# EAGLE board Messchieber_Bluetooth_biley (EAGLE 6.4)
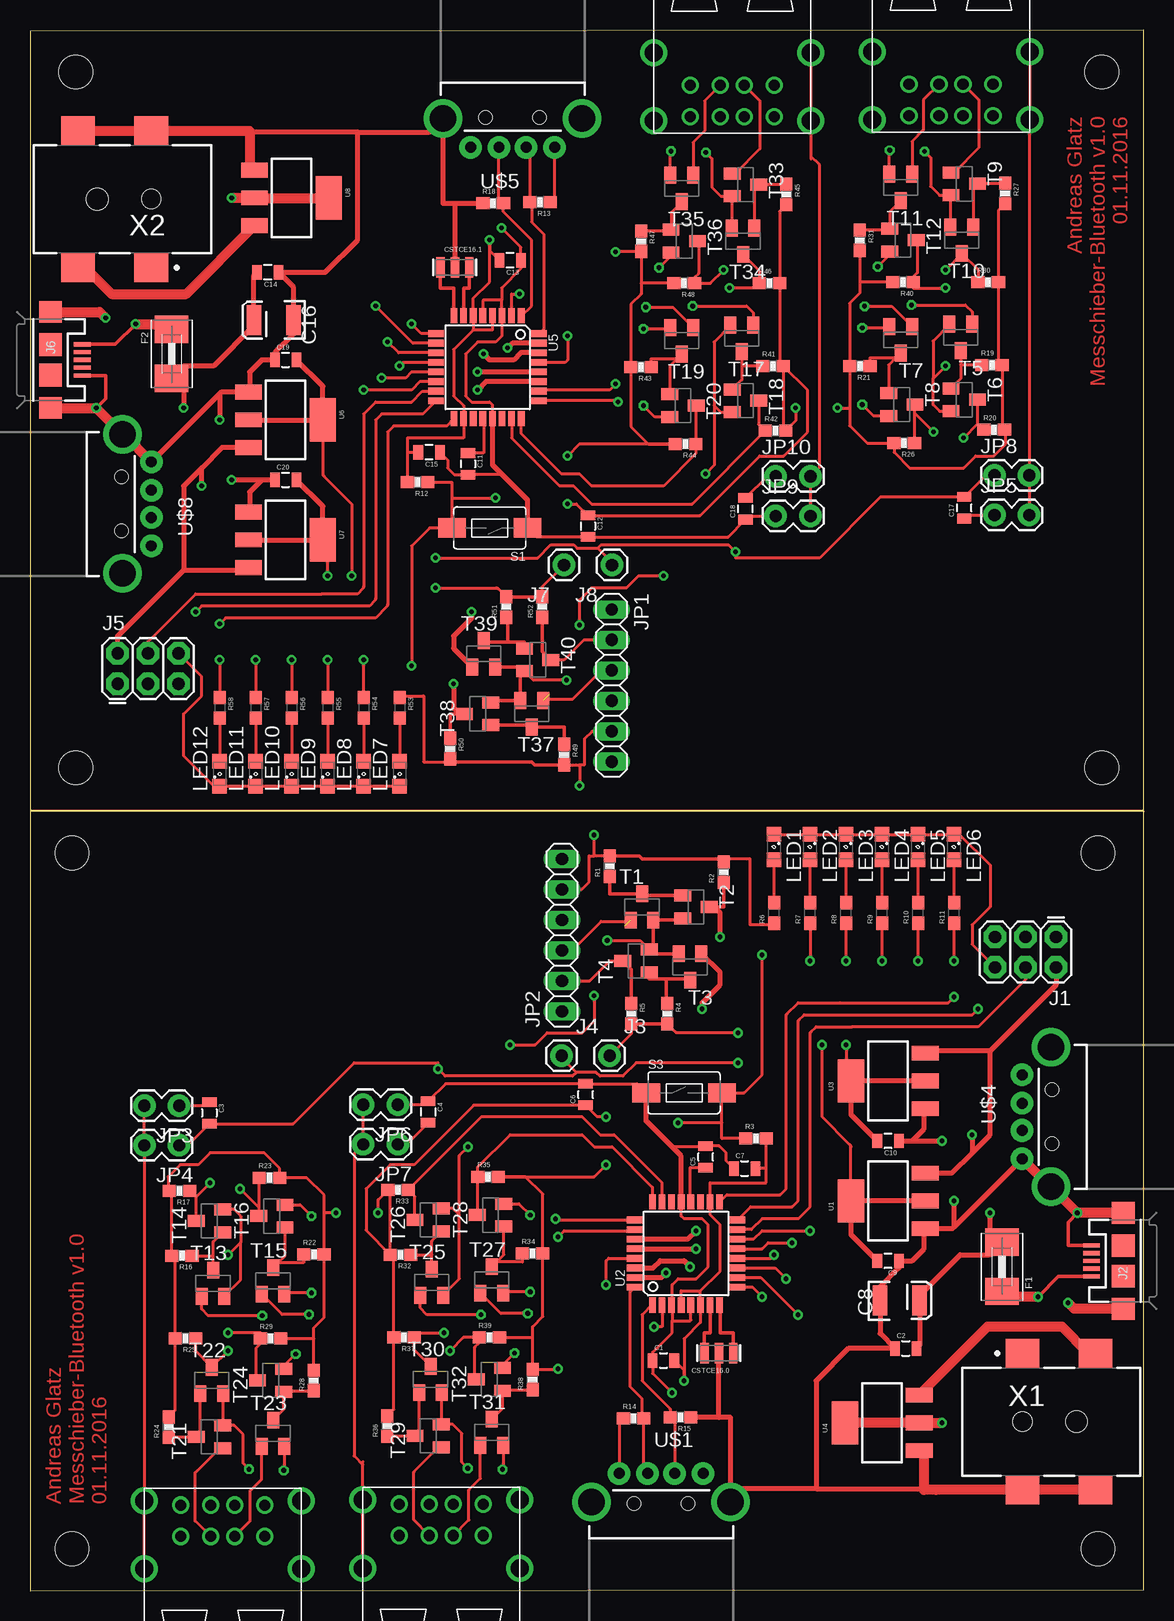
[diagram p0: board, top side]
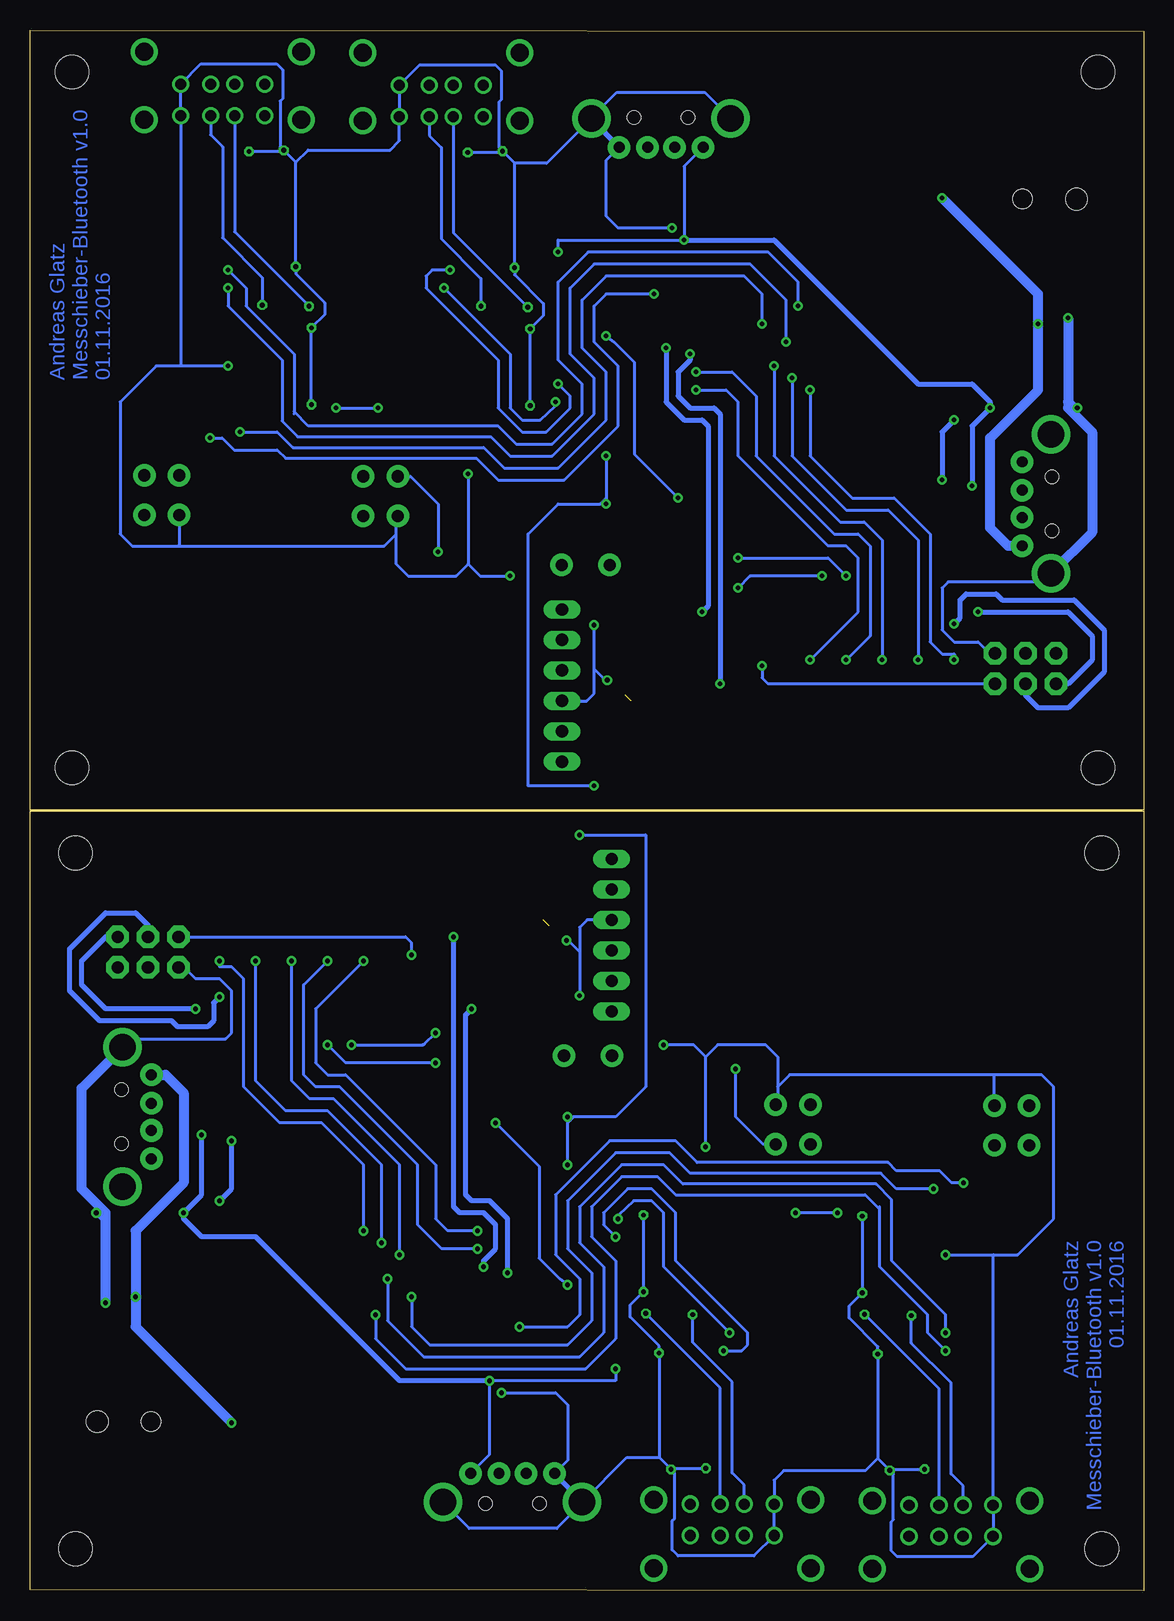
[diagram p1: board, bottom side, seen from below]

Size 92.8 x 130.1 mm. Coordinates in mm from the lower left corner, seen from the top.
Outline: 0,0 92.8,0.1 92.8,65 0,65 0,0
Outline: 92.8,130.1 0,130 0,65.1 92.8,65.1 92.8,130.1
Copper layers (1*16): Top 0.035mm / dielectric 1.5mm / Bottom 0.035mm
Design rules "bilex-lp-eagle-rules": minimum track width 10mil, minimum drill 0.4mm, track to track 10mil, track to pad 10mil, pad to pad 10mil, via to via 10mil, smd to smd 10mil, copper to edge 0.5mm, drill to drill 10mil, minimum pad ring 10mil, minimum via ring 8mil, stop-mask expansion 0.075mm, vias tented up to drill 0mil, thermal gap 10mil
Net classes: 0 default: width 0.203 mm, clearance 0.205 mm
Holes 2.8 mm at 3.5,3.5 89,61.5 3.5,61.5 89,3.5 89.3,126.6 3.8,68.6 89.3,68.6 3.8,126.6
Milling: 2 lines

## Footprints (pad centres in the part's own frame; a part is rotated, then mirrored left to right if it is on the bottom)
0805 = smd 0.8 x 1.2: 1 -0.9,0; 2 0.9,0
EIA3528 = smd 1.2 x 2.5: A 1.65,0; C -1.65,0
RESONATOR-SMD = smd 0.7 x 1.7: 1 -1.2,0; 2 0,0; 3 1.2,0
1812 = smd 2.286 x 2.794: 1 -2.046,0; 2 2.046,0
2X3 = drill 1.016 pad 1.88 octagon: 1 0,0; 2 0,2.54; 3 2.54,0; 4 2.54,2.54; 5 5.08,0; 6 5.08,2.54
USB-MICROB = smd 0.35 x 1.4: D+ 0,2.65; D- -0.65,2.65; GND 1.3,2.65; ID 0.65,2.65; VBUS -1.3,2.65 | smd 1.8 x 1.9: MT1 -4,0; MT2 4,0 | smd 1.9 x 1.9: P$1 -1.27,0; P$2 1.27,0
1X01 = drill 1.016 pad 1.88: 1 0,0
1X06 = drill 1.016 long: 1 -6.35,0; 2 -3.81,0; 3 -1.27,0; 4 1.27,0; 5 3.81,0; 6 6.35,0
1X02_LOCK = drill 1.016 pad 1.88: 1 -0.178,0; 2 2.718,0
SML0805 = smd 1.2 x 1.2: A 1.05,0; C -1.05,0
0603-RES = smd 1.1 x 1: 1 -0.85,0; 2 0.85,0
0603 = smd 1.1 x 1: 1 -0.85,0; 2 0.85,0
TACTILE-SWITCH-1101NE = smd 2.3 x 1.6: P$1 -3.15,0; P$2 3.15,0
SOT23-BCE = smd 1 x 1.4: B -0.95,-1.1; C 0.95,-1.1; E 0,1.1
SOT223 = smd 1.219 x 2.235: 1 -2.311,-3.099; 2 0,-3.099; 3 2.311,-3.099 | smd 3.6 x 2.2: 4 0,3.099
TQFP32-08@1 = smd 1.27 x 0.559: 1 -4.293,2.8; 2 -4.293,2; 3 -4.293,1.2; 4 -4.293,0.4; 5 -4.293,-0.4; 6 -4.293,-1.2; 7 -4.293,-2; 8 -4.293,-2.8; 17 4.293,-2.8; 18 4.293,-2; 19 4.293,-1.2; 20 4.293,-0.4; 21 4.293,0.4; 22 4.293,1.2; 23 4.293,2; 24 4.293,2.8 | smd 0.559 x 1.27: 9 -2.8,-4.293; 10 -2,-4.293; 11 -1.2,-4.293; 12 -0.4,-4.293; 13 0.4,-4.293; 14 1.2,-4.293; 15 2,-4.293; 16 2.8,-4.293; 25 2.8,4.293; 26 2,4.293; 27 1.2,4.293; 28 0.4,4.293; 29 -0.4,4.293; 30 -1.2,4.293; 31 -2,4.293; 32 -2.8,4.293
USB-A = drill 0.914 pad 1.88: D+ 10.02,1.127; D- 10.02,-1.127; GND 10.02,3.5; VBUS 10.02,-3.5 | drill 2.2: GND2 7.62,-5.8; GND3 7.62,5.8 | hole 1.1: 7.52,2.25; 7.52,-2.25
USB-A-2 = drill 0.92: 1-1 -3.5,-1.39; 1-2 -1,-1.39; 1-3 1,-1.39; 1-4 3.5,-1.39; 2-1 -3.5,-4.01; 2-2 -1,-4.01; 2-3 1,-4.01; 2-4 3.5,-4.01 | drill 1.5: SHIELD1 -6.55,-1.04; SHIELD2 -6.55,-6.72; SHIELD3 6.55,-6.72; SHIELD4 6.55,-1.04
CUI_PJ-002B-SMT = smd 2.4 x 2.8: 1 -5.7,11.1; 2 -5.7,5; 3 5.7,5; 4 5.7,11.1 | hole 1.8: 0,9.5 | hole 1.6: 0,5

## Placement (x,y rotation side)
C1  1uf  [0805]  52.79,19.2 0 top
C2  1uf  [0805]  72.98,20.2 0 top
C3  1uf  [0805]  14.95,39.83 270 top
C4  1uf  [0805]  33.18,39.91 270 top
C5  1uf  [0805]  56.3,36.17 90 top
C6  1uf  [0805]  46.3,41.36 90 top
C7  1uf  [0805]  59.55,35.2 0 top
C8  10uF  [EIA3528]  72.49,24.2 0 top
C9  1uf  [0805]  71.5,27.5 180 top
C10  1uf  [0805]  71.5,37.5 180 top
C11  1uf  [0805]  36.5,93.93 270 top
C12  1uf  [0805]  46.5,88.74 270 top
C13  1uf  [0805]  40.01,110.9 180 top
C14  1uf  [0805]  19.82,109.9 180 top
C15  1uf  [0805]  33.25,94.9 180 top
C16  10uF  [EIA3528]  20.31,105.9 180 top
C17  1uf  [0805]  77.85,90.27 90 top
C18  1uf  [0805]  59.62,90.19 90 top
C19  1uf  [0805]  21.3,102.6 0 top
C20  1uf  [0805]  21.3,92.6 0 top
CSTCE16.0  RESONATORSMD  [RESONATOR-SMD]  57.4,19.8 180 top
CSTCE16.1  RESONATORSMD  [RESONATOR-SMD]  35.4,110.3 0 top
F1  Fuse 0.5a  [1812]  81,27 90 top
F2  Fuse 0.5a  [1812]  11.8,103.1 270 top
J1  AVR_SPI_PRG_6PTH  [2X3]  85.5,54.5 180 top
J2  USB-MICROB  [USB-MICROB]  91.1,27.5 90 top
J3  [1X01]  48.3,44.6 0 top
J4  [1X01]  44.3,44.6 0 top
J5  AVR_SPI_PRG_6PTH  [2X3]  7.3,75.6 0 top
J6  USB-MICROB  [USB-MICROB]  1.7,102.6 270 top
J7  [1X01]  44.5,85.5 180 top
J8  [1X01]  48.5,85.5 180 top
JP1  [1X06]  48.47,75.45 270 top
JP2  [1X06]  44.33,54.65 90 top
JP3  M02LOCK  [1X02_LOCK]  12.25,40.43 180 top
JP4  M02LOCK  [1X02_LOCK]  12.25,37.13 180 top
JP5  M02LOCK  [1X02_LOCK]  80.55,89.67 0 top
JP6  M02LOCK  [1X02_LOCK]  30.48,40.51 180 top
JP7  M02LOCK  [1X02_LOCK]  30.48,37.21 180 top
JP8  M02LOCK  [1X02_LOCK]  80.55,92.97 0 top
JP9  M02LOCK  [1X02_LOCK]  62.32,89.59 0 top
JP10  M02LOCK  [1X02_LOCK]  62.32,92.89 0 top
LED1  [SML0805]  62,62 270 top
LED2  [SML0805]  65,62 270 top
LED3  [SML0805]  68,62 270 top
LED4  [SML0805]  71,62 270 top
LED5  [SML0805]  74,62 270 top
LED6  [SML0805]  77,62 270 top
LED7  [SML0805]  30.8,68.1 90 top
LED8  [SML0805]  27.8,68.1 90 top
LED9  [SML0805]  24.8,68.1 90 top
LED10  [SML0805]  21.8,68.1 90 top
LED11  [SML0805]  18.8,68.1 90 top
LED12  [SML0805]  15.8,68.1 90 top
R1  10K  [0603-RES]  48.3,60.4 90 top
R2  10K  [0603-RES]  57.8,59.9 90 top
R3  10K  [0603-RES]  60.5,37.7 0 top
R4  10K  [0603-RES]  53.1,48.1 270 top
R5  10K  [0603-RES]  50.1,48.1 270 top
R6  330  [0603]  62,56.5 90 top
R7  330  [0603]  65,56.5 90 top
R8  330  [0603]  68,56.5 90 top
R9  330  [0603]  71,56.5 90 top
R10  330  [0603]  74,56.5 90 top
R11  330  [0603]  77,56.5 90 top
R12  10K  [0603-RES]  32.3,92.4 180 top
R13  10K  [0603-RES]  42.5,115.74 180 top
R14  10K  [0603-RES]  50.3,14.36 0 top
R15  10K  [0603-RES]  54.2,14.45 180 top
R16  10K  [0603-RES]  12.65,27.93 180 top
R17  10K  [0603-RES]  12.45,33.33 180 top
R18  10K  [0603-RES]  38.6,115.65 0 top
R19  10K  [0603-RES]  80.15,102.17 0 top
R20  10K  [0603-RES]  80.35,96.77 0 top
R21  10K  [0603-RES]  69.15,102.07 180 top
R22  10K  [0603-RES]  23.65,28.03 0 top
R23  10K  [0603-RES]  19.95,34.43 0 top
R24  10K  [0603-RES]  11.55,13.63 90 top
R25  10K  [0603-RES]  12.95,21.03 180 top
R26  10K  [0603-RES]  72.85,95.67 180 top
R27  10K  [0603-RES]  81.25,116.47 270 top
R28  10K  [0603-RES]  23.65,17.53 90 top
R29  10K  [0603-RES]  20.05,21.03 0 top
R30  10K  [0603-RES]  79.85,109.07 0 top
R31  10K  [0603-RES]  69.15,112.57 270 top
R32  10K  [0603-RES]  30.88,28.01 180 top
R33  10K  [0603-RES]  30.68,33.41 180 top
R34  10K  [0603-RES]  41.88,28.11 0 top
R35  10K  [0603-RES]  38.18,34.51 0 top
R36  10K  [0603-RES]  29.78,13.71 90 top
R37  10K  [0603-RES]  31.18,21.11 180 top
R38  10K  [0603-RES]  41.88,17.61 90 top
R39  10K  [0603-RES]  38.28,21.11 0 top
R40  10K  [0603-RES]  72.75,109.07 180 top
R41  10K  [0603-RES]  61.92,102.09 0 top
R42  10K  [0603-RES]  62.12,96.69 0 top
R43  10K  [0603-RES]  50.92,101.99 180 top
R44  10K  [0603-RES]  54.62,95.59 180 top
R45  10K  [0603-RES]  63.02,116.39 270 top
R46  10K  [0603-RES]  61.62,108.99 0 top
R47  10K  [0603-RES]  50.92,112.49 270 top
R48  10K  [0603-RES]  54.52,108.99 180 top
R49  10K  [0603-RES]  44.5,69.7 270 top
R50  10K  [0603-RES]  35,70.2 270 top
R51  10K  [0603-RES]  39.7,82 90 top
R52  10K  [0603-RES]  42.7,82 90 top
R53  330  [0603]  30.8,73.6 270 top
R54  330  [0603]  27.8,73.6 270 top
R55  330  [0603]  24.8,73.6 270 top
R56  330  [0603]  21.8,73.6 270 top
R57  330  [0603]  18.8,73.6 270 top
R58  330  [0603]  15.8,73.6 270 top
S1  SWITCH  [TACTILE-SWITCH-1101NE]  38.3,88.6 180 top
S3  SWITCH  [TACTILE-SWITCH-1101NE]  54.5,41.5 0 top
T1  [SOT23-BCE]  51,57 0 top
T2  [SOT23-BCE]  55.5,57 270 top
T3  [SOT23-BCE]  55,52 180 top
T4  [SOT23-BCE]  50.5,52.5 90 top
T5  [SOT23-BCE]  77.55,104.47 180 top
T6  [SOT23-BCE]  77.85,99.27 270 top
T7  [SOT23-BCE]  72.55,104.27 180 top
T8  [SOT23-BCE]  72.65,98.87 270 top
T9  [SOT23-BCE]  77.85,117.27 270 top
T10  [SOT23-BCE]  77.65,112.57 180 top
T11  [SOT23-BCE]  72.55,116.97 180 top
T12  [SOT23-BCE]  72.75,112.57 270 top
T13  [SOT23-BCE]  15.25,25.63 0 top
T14  [SOT23-BCE]  14.95,30.83 90 top
T15  [SOT23-BCE]  20.25,25.83 0 top
T16  [SOT23-BCE]  20.15,31.23 90 top
T17  [SOT23-BCE]  59.32,104.39 180 top
T18  [SOT23-BCE]  59.62,99.19 270 top
T19  [SOT23-BCE]  54.32,104.19 180 top
T20  [SOT23-BCE]  54.42,98.79 270 top
T21  [SOT23-BCE]  14.95,12.83 90 top
T22  [SOT23-BCE]  15.15,17.53 0 top
T23  [SOT23-BCE]  20.25,13.13 0 top
T24  [SOT23-BCE]  20.05,17.53 90 top
T25  [SOT23-BCE]  33.48,25.71 0 top
T26  [SOT23-BCE]  33.18,30.91 90 top
T27  [SOT23-BCE]  38.48,25.91 0 top
T28  [SOT23-BCE]  38.38,31.31 90 top
T29  [SOT23-BCE]  33.18,12.91 90 top
T30  [SOT23-BCE]  33.38,17.61 0 top
T31  [SOT23-BCE]  38.48,13.21 0 top
T32  [SOT23-BCE]  38.28,17.61 90 top
T33  [SOT23-BCE]  59.62,117.19 270 top
T34  [SOT23-BCE]  59.42,112.49 180 top
T35  [SOT23-BCE]  54.32,116.89 180 top
T36  [SOT23-BCE]  54.52,112.49 270 top
T37  [SOT23-BCE]  41.8,73.1 180 top
T38  [SOT23-BCE]  37.3,73.1 90 top
T39  [SOT23-BCE]  37.8,78.1 0 top
T40  [SOT23-BCE]  42.3,77.6 270 top
U1  AMS 1117 3.3  [SOT223]  71.5,32.5 90 top
U2  ATMEGA328P-MU  [TQFP32-08@1]  54.67,28.11 90 top
U3  AMS 1117 1.5  [SOT223]  71.5,42.5 90 top
U4  AMS 1117 5  [SOT223]  71,14 90 top
U5  ATMEGA328P-MU  [TQFP32-08@1]  38.13,101.99 270 top
U6  AMS 1117 3.3  [SOT223]  21.3,97.6 270 top
U7  AMS 1117 1.5  [SOT223]  21.3,87.6 270 top
U8  AMS 1117 5  [SOT223]  21.8,116.1 270 top
U$1  USB-A  [USB-A]  52.59,-0.24 90 top
U$2  USB-A-2  [USB-A-2]  16.05,8.53 0 top
U$3  USB-A-2  [USB-A-2]  34.28,8.61 0 top
U$4  USB-A  [USB-A]  92.7,39.5 180 top
U$5  USB-A  [USB-A]  40.21,130.34 270 top
U$6  USB-A-2  [USB-A-2]  76.75,121.57 180 top
U$7  USB-A-2  [USB-A-2]  58.52,121.49 180 top
U$8  USB-A  [USB-A]  0.1,90.6 0 top
X1  PJ-002A-SMT  [CUI_PJ-002B-SMT]  77.7,14.1 270 top
X2  PJ-002A-SMT  [CUI_PJ-002B-SMT]  15.1,116 90 top

## Library data of the parts
C1-C7 C9-C15 C17-C20 = SparkFun-Capacitors
C8 C16 = SparkFun-Capacitors; PROD_ID: CAP-08063
CSTCE16.0 CSTCE16.1 R6-R11 R53-R58 = SparkFun
F1 F2 = adafruit
J1 J3-J5 J7 J8 JP3-JP10 = SparkFun-Connectors
J2 J6 = SparkFun-Connectors; PROD_ID: CONN-09505
JP1 JP2 = pinhead
LED1-LED12 = led
R1-R5 R12-R52 = SparkFun-Resistors
S1 S3 = SparkFun-Electromechanical
T1-T40 = transistor
U1 U3 U4 U6-U8 = SparkFun-PowerIC; PROD_ID: VREG-08170
U2 U5 = Smartprj
U$1 U$4 U$5 U$8 = andi
U$2 U$3 U$6 U$7 = usb
X1 X2 = con-cui-inc

## Nets
1.8V: C3.2 C4.2 C10.2 J4.1 JP4.1 JP7.1 U3.2 U3.4
1.8V1: C17.2 C18.2 C20.2 J8.1 JP8.1 JP10.1 U7.2 U7.4
3.3V: C9.2 J3.1 R4.2 R5.2 U1.2 U1.4
3.3V1: C19.2 J7.1 R51.2 R52.2 U6.2 U6.4
5V: C1.2 C2.2 C6.1 C7.2 C8.A F1.2 J1.2 JP2.5 R1.2 R2.2 R3.2 R6.1 R16.2 R17.2 R22.2 R23.2 R24.2 R25.2 R28.2 R29.2 R32.2 R33.2 R34.2 R35.2 R36.2 R37.2 R38.2 R39.2 U1.3 U2.4 U2.6 U2.18 U3.3 U$1.VBUS
5V1: C12.1 C13.2 C14.2 C15.2 C16.A F2.2 J5.2 JP1.5 R12.2 R19.2 R20.2 R21.2 R26.2 R27.2 R30.2 R31.2 R40.2 R41.2 R42.2 R43.2 R44.2 R45.2 R46.2 R47.2 R48.2 R49.2 R50.2 R53.1 U5.4 U5.6 U5.18 U6.3 U7.3 U$5.VBUS
GND: C1.1 C2.1 C3.1 C4.1 C5.2 C6.2 C7.1 C8.C C9.1 C10.1 CSTCE16.0.2 J1.6 J2.GND J2.MT1 J2.MT2 JP2.4 JP3.1 JP6.1 LED1.C LED2.C LED3.C LED4.C LED5.C LED6.C R14.1 R15.1 S3.P$1 T1.C T2.C T3.C T4.C T13.C T14.C T15.C T16.C T21.C T22.C T23.C T24.C T25.C T26.C T27.C T28.C T29.C T30.C T31.C T32.C U1.1 U2.3 U2.5 U2.21 U3.1 U4.1 U$1.GND U$1.GND2 U$1.GND3 U$2.1-1 U$2.2-1 U$3.1-1 U$3.2-1 U$4.GND U$4.GND2 U$4.GND3 X1.3 X1.4
GND1: C11.2 C12.2 C13.1 C14.1 C15.1 C16.C C17.1 C18.1 C19.1 C20.1 CSTCE16.1.2 J5.6 J6.GND J6.MT1 J6.MT2 JP1.4 JP5.1 JP9.1 LED7.C LED8.C LED9.C LED10.C LED11.C LED12.C R13.1 R18.1 S1.P$1 T5.C T6.C T7.C T8.C T9.C T10.C T11.C T12.C T17.C T18.C T19.C T20.C T33.C T34.C T35.C T36.C T37.C T38.C T39.C T40.C U5.3 U5.5 U5.21 U6.1 U7.1 U8.1 U$5.GND U$5.GND2 U$5.GND3 U$6.1-1 U$6.2-1 U$7.1-1 U$7.2-1 U$8.GND U$8.GND2 U$8.GND3 X2.3 X2.4
INT0: R14.2 U2.32 U$1.D+
INT1: R15.2 U2.1 U$1.D-
INT2: R13.2 U5.32 U$5.D+
INT3: R18.2 U5.1 U$5.D-
MISO: J1.1 U2.16
MISO1: J5.1 U5.16
MOSI: J1.4 U2.15
MOSI1: J5.4 U5.15
N$1: C5.1 U2.20
N$2: R1.1 T1.E T2.B
N$3: JP3.2 JP4.2 U$2.SHIELD1 U$2.SHIELD2
N$4: R4.1 T3.E T4.B
N$5: LED2.A R7.2
N$6: CSTCE16.0.1 U2.8
N$7: F1.1 J2.VBUS U4.2 U4.4 U$4.VBUS
N$8: U4.3 X1.1
N$9: LED3.A R8.2
N$10: LED1.A R6.2
N$11: R16.1 T13.E T14.B
N$12: LED4.A R9.2
N$13: LED5.A R10.2
N$14: R22.1 T15.E T16.B
N$15: R24.1 T21.E T22.B
N$16: LED6.A R11.2
N$17: R28.1 T23.E T24.B
N$18: CSTCE16.0.3 U2.7
N$19: JP6.2 JP7.2 U$3.SHIELD1 U$3.SHIELD2
N$20: JP2.1
N$21: R32.1 T25.E T26.B
N$22: R34.1 T27.E T28.B
N$23: CSTCE16.1.3 U5.7
N$24: CSTCE16.1.1 U5.8
N$25: JP2.6
N$26: R36.1 T29.E T30.B
N$27: R38.1 T31.E T32.B
N$28: C11.1 U5.20
N$29: JP1.1
N$30: JP1.6
N$31: JP5.2 JP8.2 U$6.SHIELD1 U$6.SHIELD2
N$32: R19.1 T5.E T6.B
N$33: R21.1 T7.E T8.B
N$34: R27.1 T9.E T10.B
N$35: R31.1 T11.E T12.B
N$36: JP9.2 JP10.2 U$7.SHIELD1 U$7.SHIELD2
N$37: R41.1 T17.E T18.B
N$38: R43.1 T19.E T20.B
N$39: R45.1 T33.E T34.B
N$40: R47.1 T35.E T36.B
N$41: R49.1 T37.E T38.B
N$42: R51.1 T39.E T40.B
N$43: F2.1 J6.VBUS U8.2 U8.4 U$8.VBUS
N$44: LED7.A R53.2
N$45: U8.3 X2.1
N$46: LED8.A R54.2
N$47: LED9.A R55.2
N$48: LED10.A R56.2
N$49: LED11.A R57.2
N$50: LED12.A R58.2
PROBE_LED: R11.1 U2.14
PROBE_LED1: R58.1 U5.14
RESET: J1.5 R3.1 S3.P$2 U2.29
RESET1: J5.5 R12.1 S1.P$2 U5.29
RXD: R2.1 T2.E U2.30
RXD1: R50.1 T38.E U5.30
RXD3.1: JP1.2 R52.1 T40.E
RXD3.3: JP2.2 R5.1 T4.E
SCALE_1_CLK: R17.1 T14.E U2.2
SCALE_1_CLK1: R20.1 T6.E U5.2
SCALE_1_DATA: R23.1 T16.E U2.9
SCALE_1_DATA1: R26.1 T8.E U5.9
SCALE_1_LED: R7.1 U2.27
SCALE_1_LED1: R54.1 U5.27
SCALE_2_CLK: R25.1 T22.E U2.10
SCALE_2_CLK1: R30.1 T10.E U5.10
SCALE_2_DATA: R29.1 T24.E U2.11
SCALE_2_DATA1: R40.1 T12.E U5.11
SCALE_2_LED: R8.1 U2.28
SCALE_2_LED1: R55.1 U5.28
SCALE_3_CLK: R33.1 T26.E U2.23
SCALE_3_CLK1: R42.1 T18.E U5.23
SCALE_3_DATA: R35.1 T28.E U2.24
SCALE_3_DATA1: R44.1 T20.E U5.24
SCALE_3_LED: R9.1 U2.12
SCALE_3_LED1: R56.1 U5.12
SCALE_4_CLK: R37.1 T30.E U2.25
SCALE_4_CLK1: R46.1 T34.E U5.25
SCALE_4_DATA: R39.1 T32.E U2.26
SCALE_4_DATA1: R48.1 T36.E U5.26
SCALE_4_LED: R10.1 U2.13
SCALE_4_LED1: R57.1 U5.13
SCK: J1.3 U2.17
SCK1: J5.3 U5.17
TXD3.1: JP1.3 T37.B
TXD3.3: JP2.3 T1.B
TXT: T3.B U2.31
TXT1: T39.B U5.31
USN_1_1_1: U$6.1-4
USN_1_1_2: T13.B U$2.1-2
USN_1_1_3: T15.B U$2.1-3
USN_1_1_4: U$2.1-4
USN_1_1_5: T7.B U$6.1-3
USN_1_1_6: T5.B U$6.1-2
USN_1_2_1: U$6.2-4
USN_1_2_2: T21.B U$2.2-2
USN_1_2_3: T23.B U$2.2-3
USN_1_2_4: U$2.2-4
USN_1_2_5: T11.B U$6.2-3
USN_1_2_6: T9.B U$6.2-2
USN_2_1_1: T17.B U$7.1-2
USN_2_1_2: T25.B U$3.1-2
USN_2_1_3: T27.B U$3.1-3
USN_2_1_4: U$3.1-4
USN_2_1_5: T19.B U$7.1-3
USN_2_1_6: U$7.1-4
USN_2_2_1: T33.B U$7.2-2
USN_2_2_2: T29.B U$3.2-2
USN_2_2_3: T31.B U$3.2-3
USN_2_2_4: U$3.2-4
USN_2_2_5: T35.B U$7.2-3
USN_2_2_6: U$7.2-4

## Tracks (layer width: path | path; a pad name or v marks a point on that pad's centre or on a via)
1.8V  (via drill 0.4)
  Top 0.254: JP4.1 13.15,37.13 C3.2 21.93,38.93 27,44 34,44 v34,43.5 34.6,42.9 45.2,42.9 45.5,43.2 | JP7.1 31.38,37.21 C4.2 | v68,45.5 68,42.9 U3.4 | v59,44 50.5,44 49.4,42.9 47.5,42.9 47.2,43.2 45.5,43.2 | J4.1 44.3,44.4 45.5,43.2
  Top 0.406: C10.2 68.4,39.7 U3.4 U3.2
  Bottom 0.254: v59,44 66.5,44 v68,45.5 | JP7.1 31.71,37.21 34,39.5 v34,43.5
1.8V1  (via drill 0.4)
  Top 0.254: JP8.1 79.65,92.97 C17.2 70.87,91.17 65.8,86.1 58.8,86.1 v58.8,86.6 58.2,87.2 47.6,87.2 47.3,86.9 | JP10.1 61.42,92.89 C18.2 | v24.8,84.6 24.8,87.2 U7.4 | v33.8,86.1 42.3,86.1 43.4,87.2 45.3,87.2 45.6,86.9 47.3,86.9 | J8.1 48.5,85.7 47.3,86.9
  Top 0.406: C20.2 24.4,90.4 U7.4 U7.2
  Bottom 0.254: v33.8,86.1 26.3,86.1 v24.8,84.6 | JP10.1 61.09,92.89 58.8,90.6 v58.8,86.6
3.3V  (via drill 0.4)
  Top 0.254: U1.4 68.4,36.99 arc45 68.33,37.17 66,39.5 v66,45.5 | v59,46.5 53.95,46.5 arc-45 53.78,46.57 R4.2 | R5.2 50.1,46.4 J3.1
  Top 0.305: R5.2 R4.2
  Top 0.406: C9.2 68.4,29.7 U1.4 U1.2
  Bottom 0.254: v66,45.5 60.1,45.5 arc-45 59.93,45.57 v59,46.5
3.3V1  (via drill 0.4)
  Top 0.254: U6.4 24.4,93.11 arc45 24.47,92.93 26.8,90.6 v26.8,84.6 | v33.8,83.6 38.84,83.6 arc-45 39.02,83.53 R51.2 | R52.2 42.7,83.7 J7.1
  Top 0.305: R52.2 R51.2
  Top 0.406: C19.2 24.4,100.4 U6.4 U6.2
  Bottom 0.254: v26.8,84.6 32.7,84.6 arc-45 32.87,84.53 v33.8,83.6
5V  (via drill 0.4)
  Top 0.254: R24.2 12.1,15.03 R25.2 12.1,27.63 R16.2 11.8,33.13 R17.2 | R28.2 23.65,21.03 | 23.65,21.03 23.65,21.93 24.5,22.78 R22.2 24.5,31.5 | 24.5,31.5 24.5,32.98 | 24.5,32.98 23.05,34.43 R23.2 20.8,35.2 19.5,36.5 15,36.5 14,35.5 12.5,35.5 11.5,34.5 11.5,33.43 R17.2 | R17.2 11.85,33.58 | R29.2 23.65,21.03 | R36.2 30.33,15.11 R37.2 30.33,27.71 R32.2 | R32.2 30.03,33.21 R33.2 | 41.88,21.11 41.88,22.01 42.73,22.86 R34.2 42.73,33.06 41.28,34.51 R35.2 47.01,34.51 v48,35.5 | R33.2 30.08,33.66 | R39.2 41.88,21.11 | 55.87,25 U2.6 55.87,22.37 54.5,21 v54.5,17.5 54.5,18.39 C1.2 | U2.4 54.27,25 55.87,25 | 61.35,35.2 R3.2 | 61.35,35.2 61.35,34 56.67,34 U2.18 56.67,31.33 57.5,30.5 57.5,26.63 55.87,25 | 61.35,35.2 C7.2 | v44,18.5 43.96,18.46 R38.2 41.88,21.11 | 24.5,32.98 24.52,32.98 | v29,31.5 29,32.58 R33.2 | R6.1 61.85,55.5 60,55.5 60,61 58.05,61 arc90 R2.2 | R1.2 47.3,61.25 47,61.25 | 47,61.25 v47,63 | R32.2 28,30.04 28,33.5 30,35.5 32,35.5 36.96,40.46 C6.1 47.26,39.5 v48,39.5 | v25.5,31.5 24.5,31.5 | JP2.5 45.96,58.46 46.6,59.1 46.6,61.25 47,61.25
  Top 0.305: R2.2 arc90 57.55,61 51,61 50.75,61.25 R1.2
  Top 0.406: J1.2 85.5,50.5 80,45 | 80,45 74.79,45 U3.3 | 80,45 80,38 78.5,36.5 | U1.3 76.81,34.81 78.5,36.5 | C2.2 74.14,20.46 C8.A 74.14,24.64 77.5,28 79.95,28 F1.2 80,30.05 v80,31.5 | v78.5,38 78.5,36.5
  Bottom 0.254: U$1.VBUS 54.5,11.37 v54.5,17.5 44,17.5 v44,18.5 | v25.5,31.5 v29,31.5 | v47,63 41.5,63 41.5,42 44,39.5 47.5,39.5 48,39 | v48,35.5 48,39 | 48,39 v48,39.5
  Bottom 0.406: v78.5,38 78.5,33 v80,31.5 80,31 78.5,29.5 74,29.5 62,17.5 v54.5,17.5
5V1  (via drill 0.4)
  Top 0.254: R27.2 80.7,115.07 R30.2 80.7,102.47 R19.2 81,96.97 R20.2 | R31.2 69.15,109.07 | 69.15,109.07 69.15,108.17 68.3,107.32 R21.2 68.3,98.6 | 68.3,98.6 68.3,97.12 | 68.3,97.12 69.75,95.67 R26.2 72,94.9 73.3,93.6 77.8,93.6 78.8,94.6 80.3,94.6 81.3,95.6 81.3,96.67 R20.2 | R20.2 80.95,96.52 | R40.2 69.15,109.07 | R45.2 62.47,114.99 R46.2 62.47,102.39 R41.2 | R41.2 62.77,96.89 R42.2 | 50.92,108.99 50.92,108.09 50.07,107.24 R43.2 50.07,97.04 51.52,95.59 R44.2 45.79,95.59 v44.8,94.6 | R42.2 62.72,96.44 | R48.2 50.92,108.99 | 36.93,105.1 U5.6 36.93,107.73 38.3,109.1 v38.3,112.6 38.3,111.71 C13.2 | U5.4 38.53,105.1 36.93,105.1 | 31.45,94.9 R12.2 | 31.45,94.9 31.45,96.1 36.13,96.1 U5.18 36.13,98.77 35.3,99.6 35.3,103.47 36.93,105.1 | 31.45,94.9 C15.2 | v48.8,111.6 48.84,111.64 R47.2 50.92,108.99 | 68.3,97.12 68.28,97.12 | v63.8,98.6 63.8,97.52 R42.2 | R53.1 30.95,74.6 32.8,74.6 32.8,69.1 34.75,69.1 arc90 R50.2 | R49.2 45.5,68.85 45.8,68.85 | 45.8,68.85 v45.8,67.1 | R41.2 64.8,100.06 64.8,96.6 62.8,94.6 60.8,94.6 55.84,89.64 C12.1 45.54,90.6 v44.8,90.6 | v67.3,98.6 68.3,98.6 | JP1.5 46.84,71.64 46.2,71 46.2,68.85 45.8,68.85
  Top 0.305: R50.2 arc90 35.25,69.1 41.8,69.1 42.05,68.85 R49.2
  Top 0.406: J5.2 7.3,79.6 12.8,85.1 | 12.8,85.1 18.01,85.1 U7.3 | 12.8,85.1 12.8,92.1 14.3,93.6 | U6.3 15.99,95.29 14.3,93.6 | C14.2 18.66,109.64 C16.A 18.66,105.46 15.3,102.1 12.85,102.1 F2.2 12.8,100.05 v12.8,98.6 | v14.3,92.1 14.3,93.6
  Bottom 0.254: U$5.VBUS 38.3,118.73 v38.3,112.6 48.8,112.6 v48.8,111.6 | v67.3,98.6 v63.8,98.6 | v45.8,67.1 51.3,67.1 51.3,88.1 48.8,90.6 45.3,90.6 44.8,91.1 | v44.8,94.6 44.8,91.1 | 44.8,91.1 v44.8,90.6
  Bottom 0.406: v14.3,92.1 14.3,97.1 v12.8,98.6 12.8,99.1 14.3,100.6 18.8,100.6 30.8,112.6 v38.3,112.6
GND  (via drill 0.4)
  Top 0.254: T22.C 16.1,13.83 T21.C 17,13.78 17.75,13.03 17.75,10.63 v18.25,10.13 | T23.C 21.2,10.03 v21.15,10.03 | T24.C 21.15,18.73 v22.15,19.73 | v23.45,24.83 21.3,24.83 T15.C | T16.C 22.5,32.18 v23.45,31.23 | T13.C 16.2,24.58 17.55,25.93 17.55,29.05 | T14.C 17,31.78 17.55,31.23 17.55,29.05 | JP3.1 14.65,40.43 C3.1 | T30.C 34.33,13.91 T29.C 35.23,13.86 35.98,13.11 35.98,10.71 v36.48,10.21 | T31.C 39.43,10.11 v39.38,10.11 | T32.C 39.38,18.81 v40.38,19.81 | v41.68,24.91 39.53,24.91 T27.C | T28.C 40.73,32.26 v41.68,31.31 | T25.C 34.43,24.66 35.78,26.01 35.78,31.31 | 35.78,31.31 35.23,31.86 T26.C | JP6.1 32.88,40.51 33,40.63 33,41 C4.1 34.63,42.26 C6.2 50.59,42.26 S3.P$1 | R14.1 49.09,14 U$1.GND | 53.5,37 56.3,37 C5.2 57.43,37.07 58,36.5 58,35.85 C7.1 | 53.5,22.5 55,22.5 55.07,22.57 U2.5 | U2.21 54.27,31.23 54.5,31 56,31 56.5,30.5 56.5,27 55.5,26 54,26 53.5,25.5 53.5,23.82 U2.3 53.5,23.79 53.5,22.5 | 51.89,19.89 53.5,21.5 53.5,22.5 | C1.1 51.89,18.11 v53.5,16.5 | 17.55,29.05 v16.5,28 | LED6.C LED5.C LED4.C LED3.C LED2.C LED1.C 77.45,63.05 80,60.5 80,57 78.5,55.5 78.5,53.88 J1.6 | 35.78,31.31 35.78,36.28 v36.5,37 | v47,49.6 47,47.5 46,46.5 43.1,46.5 42.1,45.5 v40,45.5 | v48.1,54.2 50.85,54.2 T4.C
  Top 0.305: T2.C 54.4,55.9 T1.C 51.95,53.45 T4.C 51.6,53.1 T3.C | J2.GND 86.5,28.8 86.5,30.72 v87.28,31.5
  Top 0.406: 82.5,36 U$4.GND 77,30.32 | 65.5,8.5 65.5,17.5 68.2,20.2 C2.1 70.84,21.44 C8.C 70.84,25.34 72.4,26.9 C9.1 73.5,27.5 74.5,28.5 74.5,30.09 U1.1 76.87,30.19 77,30.32 | 65.5,8.5 75.4,8.5 75.5,8.4 | 65.5,8.5 59.51,8.5 U$1.GND2 58.39,14.45 57.4,14.45 | 57.4,14.45 R15.1 | 57.4,14.45 CSTCE16.0.2 | U2.21 54.27,36.23 53.5,37 51.35,39.15 S3.P$1 | C10.1 73.5,37.5 | 73.5,37.5 74.5,38.5 74.5,40.09 U3.1 | 73.5,37.5 v76,37.5 | 77,30.32 v77,32.5
  Top 0.813: X1.4 X1.3 75.5,8.4 74.5,8.4 74.5,11.5 74.1,11.5 U4.1 | J2.MT2 v87.28,31.5 U$4.GND3 84.98,33.7 U$4.GND | J2.MT1 87,23.5 v86.5,24
  Bottom 0.254: v21.15,10.03 21.15,10.13 v18.25,10.13 | v21.15,10.03 20.85,9.73 20.85,5.93 21.05,5.73 21.05,3.33 20.55,2.83 14.24,2.83 U$2.2-1 U$2.1-1 12.55,27.95 12.5,28 | 22.15,11.03 v22.15,19.73 22.15,20.33 24.55,22.73 24.55,23.73 v23.45,24.83 v23.45,31.23 | 22.15,11.03 v21.15,10.03 | v39.38,10.11 39.38,10.21 v36.48,10.21 | v39.38,10.11 39.08,9.81 39.08,6.01 39.28,5.81 39.28,3.41 38.78,2.91 32.47,2.91 U$3.2-1 U$3.1-1 30.78,9.22 30,10 23.18,10 22.15,11.03 | 40.38,11.11 v40.38,19.81 40.38,20.41 42.78,22.81 42.78,23.81 v41.68,24.91 v41.68,31.31 | 40.38,11.11 v39.38,10.11 | 40.38,11.11 43.06,11.11 U$1.GND3 46.79,7.31 48.9,5.2 56.21,5.2 U$1.GND2 | v53.5,16.5 49,16.5 48,15.5 48,10.87 U$1.GND | v16.5,28 12.5,28 | 12.5,28 10.5,28 7.5,31 7.5,42 8.5,43 12.5,43 | 12.5,40.5 JP3.1 12.43,42.93 12.5,43 | 12.5,43 29.5,43 30.5,42 | 30.5,42 30.5,40.67 JP6.1 | U$4.GND2 84.38,46 76.5,46 76,46.5 76,50 77,51 79,51 79.96,51.96 J1.6 | v36.5,37 36.5,44.5 | 30.5,42 30.5,44.5 31.5,45.5 35.5,45.5 36.5,44.5 | 36.5,44.5 37.5,45.5 v40,45.5 | 47,53.25 v47,49.6 | 47,53.25 47.95,54.2 v48.1,54.2 | JP2.4 46.38,55.92 47,55.3 47,53.25
  Bottom 0.406: U$1.GND3 U$1.GND | v77,32.5 76,33.5 v76,37.5
  Bottom 0.813: v86.5,24 86.5,31 | 86.5,31 86.5,31.5 88.5,33.5 88.5,41.88 U$4.GND2 | v87.28,31.5 87,31.5 86.5,31
GND1  (via drill 0.4)
  Top 0.254: T10.C 76.7,116.27 T9.C 75.8,116.32 75.05,117.07 75.05,119.47 v74.55,119.97 | T11.C 71.6,120.07 v71.65,120.07 | T12.C 71.65,111.37 v70.65,110.37 | v69.35,105.27 71.5,105.27 T7.C | T8.C 70.3,97.92 v69.35,98.87 | T5.C 76.6,105.52 75.25,104.17 75.25,101.05 | T6.C 75.8,98.32 75.25,98.87 75.25,101.05 | JP5.1 78.15,89.67 C17.1 | T34.C 58.47,116.19 T33.C 57.57,116.24 56.82,116.99 56.82,119.39 v56.32,119.89 | T35.C 53.37,119.99 v53.42,119.99 | T36.C 53.42,111.29 v52.42,110.29 | v51.12,105.19 53.27,105.19 T19.C | T20.C 52.07,97.84 v51.12,98.79 | T17.C 58.37,105.44 57.02,104.09 57.02,98.79 | 57.02,98.79 57.57,98.24 T18.C | JP9.1 59.92,89.59 59.8,89.47 59.8,89.1 C18.1 58.17,87.84 C12.2 42.21,87.84 S1.P$1 | R13.1 43.71,116.1 U$5.GND | 39.3,93.1 36.5,93.1 C11.2 35.37,93.03 34.8,93.6 34.8,94.25 C15.1 | 39.3,107.6 37.8,107.6 37.73,107.53 U5.5 | U5.21 38.53,98.87 38.3,99.1 36.8,99.1 36.3,99.6 36.3,103.1 37.3,104.1 38.8,104.1 39.3,104.6 39.3,106.28 U5.3 39.3,106.31 39.3,107.6 | 40.91,110.21 39.3,108.6 39.3,107.6 | C13.1 40.91,111.99 v39.3,113.6 | 75.25,101.05 v76.3,102.1 | LED12.C LED11.C LED10.C LED9.C LED8.C LED7.C 15.35,67.05 12.8,69.6 12.8,73.1 14.3,74.6 14.3,76.22 J5.6 | 57.02,98.79 57.02,93.82 v56.3,93.1 | v45.8,80.5 45.8,82.6 46.8,83.6 49.7,83.6 50.7,84.6 v52.8,84.6 | v44.7,75.9 41.95,75.9 T40.C
  Top 0.305: T38.C 38.4,74.2 T37.C 40.85,76.65 T40.C 41.2,77 T39.C | J6.GND 6.3,101.3 6.3,99.38 v5.52,98.6
  Top 0.406: 10.3,94.1 U$8.GND 15.8,99.78 | 27.3,121.6 27.3,112.6 24.6,109.9 C14.1 21.96,108.66 C16.C 21.96,104.76 20.4,103.2 C19.1 19.3,102.6 18.3,101.6 18.3,100.01 U6.1 15.93,99.91 15.8,99.78 | 27.3,121.6 17.4,121.6 17.3,121.7 | 27.3,121.6 33.29,121.6 U$5.GND2 34.41,115.65 35.4,115.65 | 35.4,115.65 R18.1 | 35.4,115.65 CSTCE16.1.2 | U5.21 38.53,93.87 39.3,93.1 41.45,90.95 S1.P$1 | C20.1 19.3,92.6 | 19.3,92.6 18.3,91.6 18.3,90.01 U7.1 | 19.3,92.6 v16.8,92.6 | 15.8,99.78 v15.8,97.6
  Top 0.813: X2.4 X2.3 17.3,121.7 18.3,121.7 18.3,118.6 18.7,118.6 U8.1 | J6.MT2 v5.52,98.6 U$8.GND3 7.82,96.4 U$8.GND | J6.MT1 5.8,106.6 v6.3,106.1
  Bottom 0.254: v71.65,120.07 71.65,119.97 v74.55,119.97 | v71.65,120.07 71.95,120.37 71.95,124.17 71.75,124.37 71.75,126.77 72.25,127.27 78.56,127.27 U$6.2-1 U$6.1-1 80.25,102.15 80.3,102.1 | 70.65,119.07 v70.65,110.37 70.65,109.77 68.25,107.37 68.25,106.37 v69.35,105.27 v69.35,98.87 | 70.65,119.07 v71.65,120.07 | v53.42,119.99 53.42,119.89 v56.32,119.89 | v53.42,119.99 53.72,120.29 53.72,124.09 53.52,124.29 53.52,126.69 54.02,127.19 60.33,127.19 U$7.2-1 U$7.1-1 62.02,120.88 62.8,120.1 69.62,120.1 70.65,119.07 | 52.42,118.99 v52.42,110.29 52.42,109.69 50.02,107.29 50.02,106.29 v51.12,105.19 v51.12,98.79 | 52.42,118.99 v53.42,119.99 | 52.42,118.99 49.74,118.99 U$5.GND3 46.01,122.79 43.9,124.9 36.59,124.9 U$5.GND2 | v39.3,113.6 43.8,113.6 44.8,114.6 44.8,119.23 U$5.GND | v76.3,102.1 80.3,102.1 | 80.3,102.1 82.3,102.1 85.3,99.1 85.3,88.1 84.3,87.1 80.3,87.1 | 80.3,89.6 JP5.1 80.37,87.17 80.3,87.1 | 80.3,87.1 63.3,87.1 62.3,88.1 | 62.3,88.1 62.3,89.43 JP9.1 | U$8.GND2 8.42,84.1 16.3,84.1 16.8,83.6 16.8,80.1 15.8,79.1 13.8,79.1 12.84,78.14 J5.6 | v56.3,93.1 56.3,85.6 | 62.3,88.1 62.3,85.6 61.3,84.6 57.3,84.6 56.3,85.6 | 56.3,85.6 55.3,84.6 v52.8,84.6 | 45.8,76.85 v45.8,80.5 | 45.8,76.85 44.85,75.9 v44.7,75.9 | JP1.4 46.42,74.18 45.8,74.8 45.8,76.85
  Bottom 0.406: U$5.GND3 U$5.GND | v15.8,97.6 16.8,96.6 v16.8,92.6
  Bottom 0.813: v6.3,106.1 6.3,99.1 | 6.3,99.1 6.3,98.6 4.3,96.6 4.3,88.22 U$8.GND2 | v5.52,98.6 5.8,98.6 6.3,99.1
INT0
  Top 0.254: U$1.D+ 51.15,10.09 R14.2 51,14.51 51,16 50,17 50,24.93 U2.32
INT1
  Top 0.254: U$1.D- 53.72,14.08 R15.2 53.35,15.15 51,17.5 51,23 51.82,23.82 U2.1
INT2
  Top 0.254: U$5.D+ 41.65,120.01 R13.2 41.8,115.59 41.8,114.1 42.8,113.1 42.8,105.17 U5.32
INT3
  Top 0.254: U$5.D- 39.08,116.02 R18.2 39.45,114.95 41.8,112.6 41.8,107.1 40.98,106.28 U5.1
MISO  (via drill 0.4)
  Top 0.254: U2.16 60.05,32 63.5,32 64,32.5 64,47.4 arc-45 64.07,47.57 64.5,48 78.5,48 v79,48.5
  Bottom 0.406: v79,48.5 86.5,48.5 88.5,50.5 88.5,52.5 86.5,54.5 J1.1
MISO1  (via drill 0.4)
  Top 0.254: U5.16 32.75,98.1 29.3,98.1 28.8,97.6 28.8,82.7 arc-45 28.73,82.53 28.3,82.1 14.3,82.1 v13.8,81.6
  Bottom 0.406: v13.8,81.6 6.3,81.6 4.3,79.6 4.3,77.6 6.3,75.6 J5.1
MOSI
  Top 0.254: J1.4 82.96,50.96 79,47 68.5,47 65.5,47 65.07,46.57 arc45 65,46.4 65,32 64,31 61,31 60.11,30.11 U2.15
MOSI1
  Top 0.254: J5.4 9.84,79.14 13.8,83.1 24.3,83.1 27.3,83.1 27.73,83.53 arc45 27.8,83.7 27.8,98.1 28.8,99.1 31.8,99.1 32.69,99.99 U5.15
N$1
  Top 0.254: U2.20 55,32.47 55,35.27 C5.1
N$2
  Top 0.305: T2.B 51.15,57.95 T1.E 48.3,58.1 R1.1
N$3
  Top 0.254: U$2.SHIELD2 U$2.SHIELD1 9.5,37.1 JP4.2 JP3.2
N$4
  Top 0.305: R4.1 53,48.95 53,51 | 53,51 51.6,51 T4.B | T3.E 54.9,51 53,51
N$5
  Top 0.254: R7.2 LED2.A
N$6
  Top 0.305: CSTCE16.0.1 58.6,21.5 57.5,21.5 57.5,23.82 U2.8
N$7  (via drill 0.4)
  Top 0.305: J2.VBUS 85.7,26.2 v84,24.5
  Top 0.813: U4.4 U4.2 v76,14 | v84,24.5 81.45,24.5 F1.1
  Bottom 0.813: U$4.VBUS 81.5,43 80,41.5 80,34 84,30 v84,24.5 84,22 v76,14
N$8
  Top 0.813: X1.1 88.2,19.8 86,22 79.79,22 U4.3
N$9
  Top 0.254: R8.2 LED3.A
N$10
  Top 0.254: R6.2 LED1.A
N$11
  Top 0.254: T13.E 15.25,27.93 | 15.25,27.93 15.25,29.08 T14.B | R16.1 15.25,27.93
N$12
  Top 0.254: R9.2 LED4.A
N$13
  Top 0.254: R10.2 LED5.A
N$14
  Top 0.254: 20.3,26.88 T15.E 20.65,27.33 | 20.65,27.33 21.25,27.93 T16.B | R22.1 22.8,27.33 20.65,27.33
N$15
  Top 0.254: T22.B 14.2,13.18 T21.E 13.8,12.78 R24.1
N$16
  Top 0.254: R11.2 LED6.A
N$17
  Top 0.254: T23.E 21.15,15.13 T24.B 21.25,16.68 R28.1
N$18
  Top 0.305: CSTCE16.0.3 56.2,21.5 56.67,21.5 U2.7
N$19
  Top 0.254: U$3.SHIELD2 U$3.SHIELD1 27.73,10.5 | JP7.2 JP6.2 | JP7.2 27.73,37.18 | 27.73,10.5 27.73,10.77 | JP7.2 27,36.45 27,11.23 27.73,10.5
N$21
  Top 0.254: T25.E 33.48,28.01 | 33.48,28.01 33.48,29.16 T26.B | R32.1 33.48,28.01
N$22
  Top 0.254: 38.53,26.96 T27.E 38.88,27.41 | 38.88,27.41 39.48,28.01 T28.B | R34.1 41.03,27.41 38.88,27.41
N$23
  Top 0.305: CSTCE16.1.3 36.6,108.6 36.13,108.6 U5.7
N$24
  Top 0.305: CSTCE16.1.1 34.2,108.6 35.3,108.6 35.3,106.28 U5.8
N$26
  Top 0.254: T30.B 32.43,13.26 T29.E 32.03,12.86 R36.1
N$27
  Top 0.254: T31.E 39.38,15.21 T32.B 39.48,16.76 R38.1
N$28
  Top 0.254: U5.20 37.8,97.63 37.8,94.83 C11.1
N$31
  Top 0.254: U$6.SHIELD2 U$6.SHIELD1 83.3,93 JP8.2 JP5.2
N$32
  Top 0.254: T5.E 77.55,102.17 | 77.55,102.17 77.55,101.02 T6.B | R19.1 77.55,102.17
N$33
  Top 0.254: 72.5,103.22 T7.E 72.15,102.77 | 72.15,102.77 71.55,102.17 T8.B | R21.1 70,102.77 72.15,102.77
N$34
  Top 0.254: T10.B 78.6,116.92 T9.E 79,117.32 R27.1
N$35
  Top 0.254: T11.E 71.65,114.97 T12.B 71.55,113.42 R31.1
N$36
  Top 0.254: U$7.SHIELD2 U$7.SHIELD1 65.07,119.6 | JP10.2 JP9.2 | JP10.2 65.07,92.92 | 65.07,119.6 65.07,119.33 | JP10.2 65.8,93.65 65.8,118.87 65.07,119.6
N$37
  Top 0.254: T17.E 59.32,102.09 | 59.32,102.09 59.32,100.94 T18.B | R41.1 59.32,102.09
N$38
  Top 0.254: 54.27,103.14 T19.E 53.92,102.69 | 53.92,102.69 53.32,102.09 T20.B | R43.1 51.77,102.69 53.92,102.69
N$39
  Top 0.254: T34.B 60.37,116.84 T33.E 60.77,117.24 R45.1
N$40
  Top 0.254: T35.E 53.42,114.89 T36.B 53.32,113.34 R47.1
N$41
  Top 0.305: T38.B 41.65,72.15 T37.E 44.5,72 R49.1
N$42
  Top 0.305: R51.1 39.8,81.15 39.8,79.1 | 39.8,79.1 41.2,79.1 T40.B | T39.E 37.9,79.1 39.8,79.1
N$43  (via drill 0.4)
  Top 0.305: J6.VBUS 7.1,103.9 v8.8,105.6
  Top 0.813: U8.4 U8.2 v16.8,116.1 | v8.8,105.6 11.35,105.6 F2.1
  Bottom 0.813: U$8.VBUS 11.3,87.1 12.8,88.6 12.8,96.1 8.8,100.1 v8.8,105.6 8.8,108.1 v16.8,116.1
N$44
  Top 0.254: R53.2 LED7.A
N$45
  Top 0.813: X2.1 4.6,110.3 6.8,108.1 13.01,108.1 U8.3
N$46
  Top 0.254: R54.2 LED8.A
N$47
  Top 0.254: R55.2 LED9.A
N$48
  Top 0.254: R56.2 LED10.A
N$49
  Top 0.254: R57.2 LED11.A
N$50
  Top 0.254: R58.2 LED12.A
PROBE_LED  (via drill 0.4)
  Top 0.254: U2.14 60.31,29.31 61,30 v65,30 | v77,52.5 R11.1
  Bottom 0.254: v65,30 65,35.5 68.5,39 72,39 75,42 75,51 76,52 77,52 v77,52.5
PROBE_LED1  (via drill 0.4)
  Top 0.254: U5.14 32.49,100.79 31.8,100.1 v27.8,100.1 | v15.8,77.6 R58.1
  Bottom 0.254: v27.8,100.1 27.8,94.6 24.3,91.1 20.8,91.1 17.8,88.1 17.8,79.1 16.8,78.1 15.8,78.1 v15.8,77.6
RESET  (via drill 0.4)
  Top 0.254: v48,25.5 48,27.5 48.21,27.71 U2.29 | R3.1 57.65,37.7 57.65,39 | 57.65,39 S3.P$2 59.5,41.5 61,43 v61,53 | 57.65,39 v54,39
  Top 0.406: 54,38.85 v54,39
  Bottom 0.254: v54,39 50.38,35.38 U2.29 48.67,26 v48,25.5 | J1.5 61.5,54.5 61,54 v61,53
RESET1  (via drill 0.4)
  Top 0.254: v44.8,104.6 44.8,102.6 44.59,102.39 U5.29 | R12.1 35.15,92.4 35.15,91.1 | 35.15,91.1 S1.P$2 33.3,88.6 31.8,87.1 v31.8,77.1 | 35.15,91.1 v38.8,91.1
  Top 0.406: 38.8,91.25 v38.8,91.1
  Bottom 0.254: v38.8,91.1 42.42,94.72 U5.29 44.13,104.1 v44.8,104.6 | J5.5 31.3,75.6 31.8,76.1 v31.8,77.1
RXD  (via drill 0.4)
  Top 0.305: 57,57 57.8,57 R2.1
  Top 0.406: v57.5,54.5 57.5,56.5 57,57 T2.E | U2.30 51.91,26.91 52.5,27.5 54.5,27.5 v55,27
  Bottom 0.406: v57.5,54.5 57.5,32 57,31.5 55,31.5 54,30.5 54,28.5 55,27.5 v55,27
RXD1  (via drill 0.4)
  Top 0.305: 35.8,73.1 35,73.1 R50.1
  Top 0.406: v35.3,75.6 35.3,73.6 35.8,73.1 T38.E | U5.30 40.89,103.19 40.3,102.6 38.3,102.6 v37.8,103.1
  Bottom 0.406: v35.3,75.6 35.3,98.1 35.8,98.6 37.8,98.6 38.8,99.6 38.8,101.6 37.8,102.6 v37.8,103.1
RXD3.1
  Top 0.254: JP1.2 46.16,79.26 44.5,77.6 T40.E
  Top 0.305: T40.E 42.7,78.3 R52.1
RXD3.3
  Top 0.254: JP2.2 46.64,50.84 48.3,52.5 T4.E
  Top 0.305: T4.E 50.1,51.8 R5.1
SCALE_1_CLK  (via drill 0.4)
  Top 0.254: R17.1 13.85,32.78 T14.E 13.85,32.85 v15,34 | U2.2 52.67,22 v52,22
  Bottom 0.254: v15,34 16,34 17,35 20.6,35 21.3,35.7 37.2,35.7 39,37.5 44.5,37.5 49,33 49,28 47,26 47,23 48,22 v52,22
SCALE_1_CLK1  (via drill 0.4)
  Top 0.254: R20.1 78.95,97.32 T6.E 78.95,97.25 v77.8,96.1 | U5.2 40.13,108.1 v40.8,108.1
  Bottom 0.254: v77.8,96.1 76.8,96.1 75.8,95.1 72.2,95.1 71.5,94.4 55.6,94.4 53.8,92.6 48.3,92.6 43.8,97.1 43.8,102.1 45.8,104.1 45.8,107.1 44.8,108.1 v40.8,108.1
SCALE_1_DATA  (via drill 0.4)
  Top 0.254: T16.E 19.1,31.28 19.1,31.9 | 19.1,31.9 R23.1 | 19.1,31.9 v17.5,33.5 | U2.9 60.19,25.31 v61,24.5
  Bottom 0.254: v17.5,33.5 20.6,33.5 21.9,34.8 37.8,34.8 39.5,36.5 44,36.5 48,32.5 48,28.5 46,26.5 46,22.5 48,20.5 59.5,20.5 61,22 v61,24.5
SCALE_1_DATA1  (via drill 0.4)
  Top 0.254: T8.E 73.7,98.82 73.7,98.2 | 73.7,98.2 R26.1 | 73.7,98.2 v75.3,96.6 | U5.9 32.61,104.79 v31.8,105.6
  Bottom 0.254: v75.3,96.6 72.2,96.6 70.9,95.3 55,95.3 53.3,93.6 48.8,93.6 44.8,97.6 44.8,101.6 46.8,103.6 46.8,107.6 44.8,109.6 33.3,109.6 31.8,108.1 v31.8,105.6
SCALE_1_LED  (via drill 0.4)
  Top 0.254: R7.1 v65,52.5
  Top 0.406: U2.27 54.81,29.31 v55.5,30
  Bottom 0.254: v55.5,30 58,30 59,31 59,35.5 66.5,43 68,43 69,44 69,48.5 v65,52.5
SCALE_1_LED1  (via drill 0.4)
  Top 0.254: R54.1 v27.8,77.6
  Top 0.406: U5.27 37.99,100.79 v37.3,100.1
  Bottom 0.254: v37.3,100.1 34.8,100.1 33.8,99.1 33.8,94.6 26.3,87.1 24.8,87.1 23.8,86.1 23.8,81.6 v27.8,77.6
SCALE_2_CLK  (via drill 0.4)
  Top 0.254: R25.1 13.8,19.98 T22.E 15.15,18.65 v16.5,20 | U2.10 60.89,26.11 v64,23
  Bottom 0.254: v16.5,20 18,21.5 18,23 22,27 22,31.8 | 22,31.8 22,32 | v64,23 64,21 61.5,18.5 46.5,18.5 44,21 44,27.5 46,29.5 46,32 43.5,34.5 40.5,34.5 39,33 23.2,33 22,31.8
SCALE_2_CLK1  (via drill 0.4)
  Top 0.254: R30.1 79,110.12 T10.E 77.65,111.45 v76.3,110.1 | U5.10 31.91,103.99 v28.8,107.1
  Bottom 0.254: v76.3,110.1 74.8,108.6 74.8,107.1 70.8,103.1 70.8,98.3 | 70.8,98.3 70.8,98.1 | v28.8,107.1 28.8,109.1 31.3,111.6 46.3,111.6 48.8,109.1 48.8,102.6 46.8,100.6 46.8,98.1 49.3,95.6 52.3,95.6 53.8,97.1 69.6,97.1 70.8,98.3
SCALE_2_DATA  (via drill 0.4)
  Top 0.254: T24.E 18.85,17.63 18.85,20.23 19.2,20.58 R29.1 19.2,21.5 v16.5,21.5 | U2.11 62.09,26.91 v63,26
  Bottom 0.254: v16.5,21.5 16.5,23 21,27.5 21,32.6 22.3,33.9 38.4,33.9 40,35.5 43.5,35.5 47,32 47,29 45,27 45,21.5 47,19.5 60,19.5 63,22.5 v63,26
SCALE_2_DATA1  (via drill 0.4)
  Top 0.254: T12.E 73.95,112.47 73.95,109.87 73.6,109.52 R40.1 73.6,108.6 v76.3,108.6 | U5.11 30.71,103.19 v29.8,104.1
  Bottom 0.254: v76.3,108.6 76.3,107.1 71.8,102.6 71.8,97.5 70.5,96.2 54.4,96.2 52.8,94.6 49.3,94.6 45.8,98.1 45.8,101.1 47.8,103.1 47.8,108.6 45.8,110.6 32.8,110.6 29.8,107.6 v29.8,104.1
SCALE_2_LED  (via drill 0.4)
  Top 0.254: v68,52.5 R8.1
  Top 0.406: U2.28 v55.5,28.5
  Bottom 0.254: v55.5,28.5 58.5,28.5 60.5,30.5 60.5,35.5 67,42 69,42 70,43 70,50.5 v68,52.5
SCALE_2_LED1  (via drill 0.4)
  Top 0.254: v24.8,77.6 R55.1
  Top 0.406: U5.28 v37.3,101.6
  Bottom 0.254: v37.3,101.6 34.3,101.6 32.3,99.6 32.3,94.6 25.8,88.1 23.8,88.1 22.8,87.1 22.8,79.6 v24.8,77.6
SCALE_3_CLK
  Top 0.254: T26.E 32.08,32.86 R33.1 | U2.23 52.67,34 48.67,38 47.5,38 46,39.5 37.62,39.5 R33.1 | R33.1 31.53,33.53
SCALE_3_CLK1
  Top 0.254: T18.E 60.72,97.24 R42.1 | U5.23 40.13,96.1 44.13,92.1 45.3,92.1 46.8,90.6 55.18,90.6 R42.1 | R42.1 61.27,96.57
SCALE_3_DATA
  Top 0.254: T28.E 37.33,31.36 R35.1 37.33,35.33 40,38 46,38 47,37 48.5,37 51.87,33.63 U2.24 51.77,32.5
SCALE_3_DATA1
  Top 0.254: T20.E 55.47,98.74 R44.1 55.47,94.77 52.8,92.1 46.8,92.1 45.8,93.1 44.3,93.1 40.93,96.47 U5.24 41.03,97.6
SCALE_3_LED  (via drill 0.4)
  Top 0.254: U2.12 61.71,27.71 v62,28 | v71,52.5 R9.1
  Bottom 0.254: v62,28 62,35.5 67.5,41 69.5,41 71,42.5 v71,52.5
SCALE_3_LED1  (via drill 0.4)
  Top 0.254: U5.12 31.09,102.39 v30.8,102.1 | v21.8,77.6 R56.1
  Bottom 0.254: v30.8,102.1 30.8,94.6 25.3,89.1 23.3,89.1 21.8,87.6 v21.8,77.6
SCALE_4_CLK  (via drill 0.4)
  Top 0.254: T30.E 32.03,20.06 R37.1 32.42,21.5 v34.5,21.5 | v43.8,31 43.59,30.91 U2.25
  Bottom 0.254: v34.5,21.5 40,27 40,31.5 41,32.5 42.5,32.5 43.8,31.3 v43.8,31
SCALE_4_CLK1  (via drill 0.4)
  Top 0.254: T34.E 60.77,110.04 R46.1 60.38,108.6 v58.3,108.6 | v49,99.1 49.21,99.19 U5.25
  Bottom 0.254: v58.3,108.6 52.8,103.1 52.8,98.6 51.8,97.6 50.3,97.6 49,98.8 v49,99.1
SCALE_4_DATA  (via drill 0.4)
  Top 0.254: T32.E 37.08,17.71 37.08,20.31 37.43,20.66 R39.1 36.11,21.11 v35,20 | v44,29.5 44.5,30 50.27,30 U2.26
  Bottom 0.254: v35,20 33.5,20 33,20.5 33,21.5 39,27.5 39,31.5 41,33.5 43,33.5 45,31.5 45,30.5 v44,29.5
SCALE_4_DATA1  (via drill 0.4)
  Top 0.254: T36.E 55.72,112.39 55.72,109.79 55.37,109.44 R48.1 56.69,108.99 v57.8,110.1 | v48.8,100.6 48.3,100.1 42.53,100.1 U5.26
  Bottom 0.254: v57.8,110.1 59.3,110.1 59.8,109.6 59.8,108.6 53.8,102.6 53.8,98.6 51.8,96.6 49.8,96.6 47.8,98.6 47.8,99.6 v48.8,100.6
SCALE_4_LED  (via drill 0.4)
  Top 0.254: U2.13 61.01,28.51 61.5,29 v63.5,29 | v74,52.5 R10.1
  Bottom 0.254: v74,52.5 74,42.5 71.5,40 68,40 63.5,35.5 v63.5,29
SCALE_4_LED1  (via drill 0.4)
  Top 0.254: U5.13 31.79,101.59 31.3,101.1 v29.3,101.1 | v18.8,77.6 R57.1
  Bottom 0.254: v18.8,77.6 18.8,87.6 21.3,90.1 24.8,90.1 29.3,94.6 v29.3,101.1
SCK  (via drill 0.4)
  Top 0.254: U2.17 58.07,33 62.5,33 63,33.5 63,47.9 arc-45 63.07,48.07 64,49 67.5,49 76.5,49 v77,49.5
  Bottom 0.406: v77,49.5 77.5,49 77.5,47.5 78,47 80.5,47 81,47.5 87,47.5 89.5,50 89.5,53.5 86.5,56.5 84,56.5 82.96,55.46 J1.3
SCK1  (via drill 0.4)
  Top 0.254: U5.17 34.73,97.1 30.3,97.1 29.8,96.6 29.8,82.2 arc-45 29.73,82.03 28.8,81.1 25.3,81.1 16.3,81.1 v15.8,80.6
  Bottom 0.406: v15.8,80.6 15.3,81.1 15.3,82.6 14.8,83.1 12.3,83.1 11.8,82.6 5.8,82.6 3.3,80.1 3.3,76.6 6.3,73.6 8.8,73.6 9.84,74.64 J5.3
TXD3.1  (1 unrouted)
  Top 0.254: JP1.3 47.62,76.72 45.2,74.3 42.85,74.3 T37.B
  Top 0.305: T37.B 42.77,74.18
TXD3.3  (1 unrouted)
  Top 0.254: JP2.3 45.18,53.38 47.6,55.8 49.95,55.8 T1.B
  Top 0.305: T1.B 50.03,55.92
TXT  (via drill 0.4)
  Top 0.406: U2.31 52.61,26.11 v53,26.5 | v56,48.5 56,49 57.5,50.5 57.5,51.55 T3.B
  Bottom 0.406: v53,26.5 53,31 54.5,32.5 56,32.5 56.5,33 56.5,48 v56,48.5
TXT1  (via drill 0.4)
  Top 0.406: U5.31 40.19,103.99 v39.8,103.6 | v36.8,81.6 36.8,81.1 35.3,79.6 35.3,78.55 T39.B
  Bottom 0.406: v39.8,103.6 39.8,99.1 38.3,97.6 36.8,97.6 36.3,97.1 36.3,82.1 v36.8,81.6
USN_1_1_2  (via drill 0.4)
  Top 0.254: v19.35,22.93 14.85,22.93 14.3,23.48 T13.B
  Bottom 0.254: U$2.1-2 15.05,8.73 16.05,9.73 16.05,17.33 19.35,20.63 v19.35,22.93
USN_1_1_3  (via drill 0.4)
  Top 0.254: v23.25,23.03 21,23.03 T15.B
  Bottom 0.254: U$2.1-3 17.05,16.83 v23.25,23.03
USN_1_1_5  (via drill 0.4)
  Top 0.254: v69.55,107.07 71.8,107.07 T7.B
  Bottom 0.254: U$6.1-3 75.75,113.27 v69.55,107.07
USN_1_1_6  (via drill 0.4)
  Top 0.254: v73.45,107.17 77.95,107.17 78.5,106.62 T5.B
  Bottom 0.254: U$6.1-2 77.75,121.37 76.75,120.37 76.75,112.77 73.45,109.47 v73.45,107.17
USN_1_2_2
  Top 0.254: U$2.2-2 13.75,5.82 13.75,9.83 15.8,11.88 T21.B
USN_1_2_3
  Top 0.254: U$2.2-3 18.35,5.82 18.35,8.33 19.3,9.28 T23.B
USN_1_2_5
  Top 0.254: U$6.2-3 74.45,124.28 74.45,121.77 73.5,120.82 T11.B
USN_1_2_6
  Top 0.254: U$6.2-2 79.05,124.28 79.05,120.27 77,118.22 T9.B
USN_2_1_1  (via drill 0.4)
  Top 0.254: v55.22,107.09 59.72,107.09 60.27,106.54 T17.B
  Bottom 0.254: U$7.1-2 59.52,121.29 58.52,120.29 58.52,112.69 55.22,109.39 v55.22,107.09
USN_2_1_2  (via drill 0.4)
  Top 0.254: v37.58,23.01 33.08,23.01 32.53,23.56 T25.B
  Bottom 0.254: U$3.1-2 33.28,8.81 34.28,9.81 34.28,17.41 37.58,20.71 v37.58,23.01
USN_2_1_3  (via drill 0.4)
  Top 0.254: v41.48,23.11 39.23,23.11 T27.B
  Bottom 0.254: U$3.1-3 35.28,16.91 v41.48,23.11
USN_2_1_5  (via drill 0.4)
  Top 0.254: v51.32,106.99 53.57,106.99 T19.B
  Bottom 0.254: U$7.1-3 57.52,113.19 v51.32,106.99
USN_2_2_1
  Top 0.254: U$7.2-2 60.82,124.2 60.82,120.19 58.77,118.14 T33.B
USN_2_2_2
  Top 0.254: U$3.2-2 31.98,5.9 31.98,9.91 34.03,11.96 T29.B
USN_2_2_3
  Top 0.254: U$3.2-3 36.58,5.9 36.58,8.41 37.53,9.36 T31.B
USN_2_2_5
  Top 0.254: U$7.2-3 56.22,124.2 56.22,121.69 55.27,120.74 T35.B

## Text on the board
Top: Andreas Glatz / Messchieber-Bluetooth v1.0 / 01.11.2016 | Andreas Glatz / Messchieber-Bluetooth v1.0 / 01.11.2016
Bottom: Andreas Glatz / Messchieber-Bluetooth v1.0 / 01.11.2016 | Andreas Glatz / Messchieber-Bluetooth v1.0 / 01.11.2016